# Altium PCB wakerdimmer.pcbdoc (part 1 of 2)
Units mil, origin at the board's own origin, x right, y up, seen from the top; angles counter-clockwise.
Board outline 8825.01 x 3314.36 mil, 2 copper layers (Top Layer, Bottom Layer); 48 components, 82 nets, 207 pads, 61 vias.
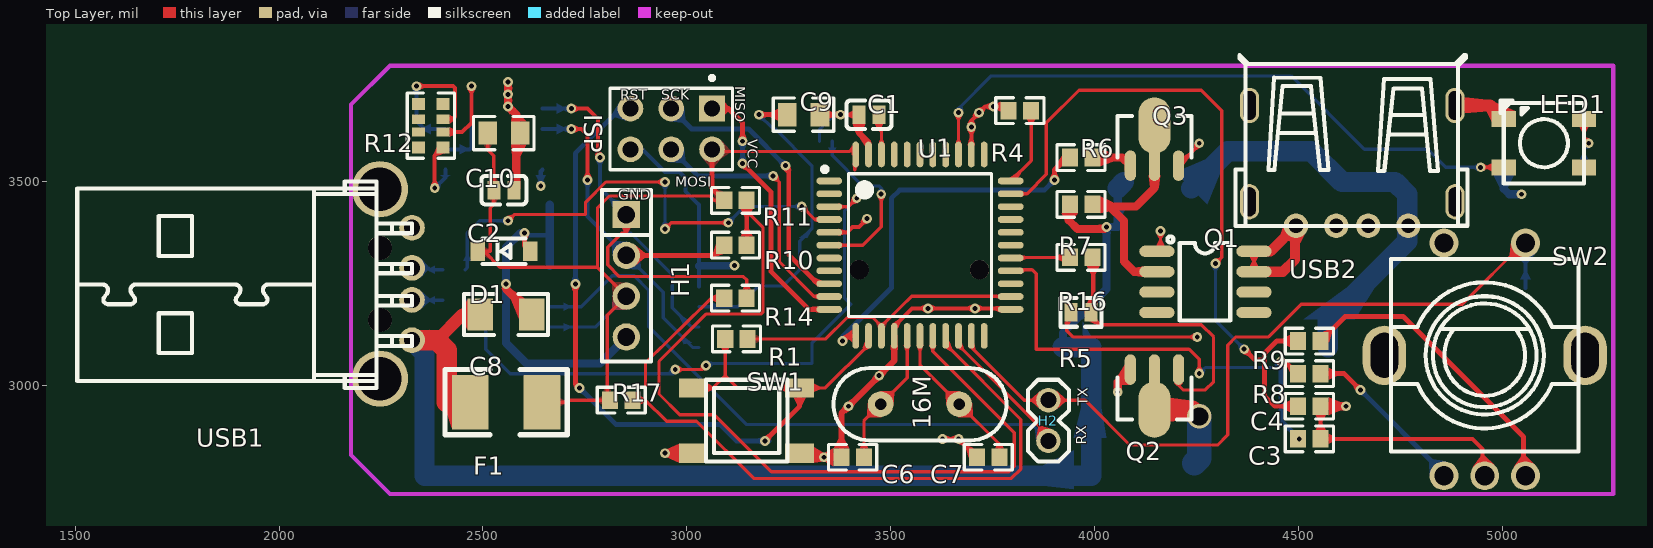
[diagram p0: Top Layer view]
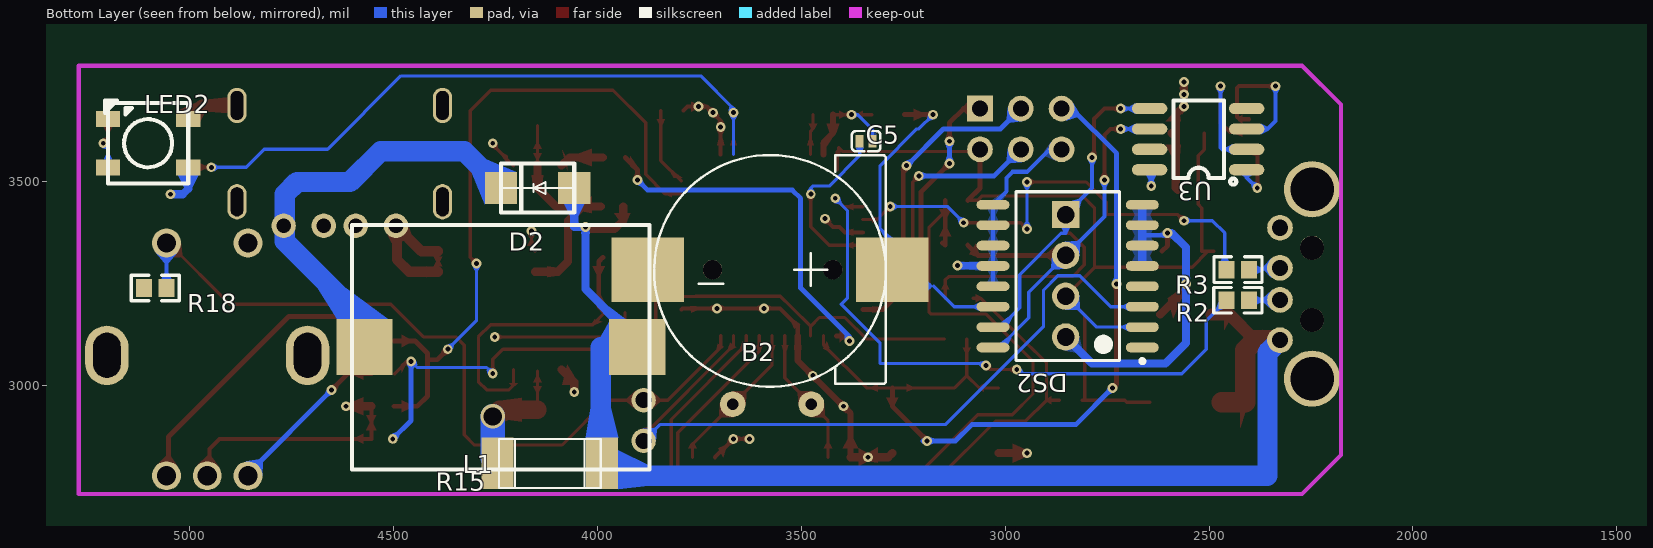
[diagram p1: Bottom Layer view, seen from below]

## Layer stack, top to bottom
Top Layer: signal copper (thickness not stored)
Dielectric: dielectric 12.6, FR-4, Dk 4.8
Bottom Layer: signal copper (thickness not stored)

## Board outline
9825.01,1000 1000,1000 1000,4314.36 9825.01,4314.36

## Components (designator, comment, footprint, x,y, rotation, side; value= is the part's Value field where it differs from the comment)
16M "16MHz" OSC-49S-1 3571.67,2953.51 r90 top
B2 "纽扣电池座CR1220-2" BATTERY-2 3276.67,3283.51 r180 bottom
C1 "100nF" CAP_0603 3446.67,3663.51 r0 top
C2 "100nF" CAP_0603 2551.28,3478.51 r180 top
C3 "100nF" 0603#1 4526.67,2868.51 r0 top
C4 "100nF" 0603#1 4526.67,2948.51 r180 top
C5 "1uF" CAP_0402 3340.92,3598.51 r0 bottom
C6 "20pF" 0603#1 3406.67,2823.51 r0 top
C7 "20pF" 0603#1 3739.11,2823.51 r0 top
C8 "10uF" 1206 2556.67,3173.51 r180 top
C9 "100nF" 0805 3286.67,3663.51 r0 top
C10 "100nF" 0805 2551.67,3618.51 r0 top
D1 "DZL4734" SOD-123F 2551.67,3328.51 r180 top
D2 "S2K" SMA 4146.67,3483.51 r180 bottom
DS2 "ds2" ? 2846.67,3208.51 r180 bottom
F1 "SMD1812P050TF/30" 1812 2556.67,2958.51 r0 top
H1 "0.91 OLED" DIP-1X4P2.54 2851.67,3268.51 r270 top
H2 "210S-1*2P L=11.6MMGold-plated black" 210S-1X2P 3886.67,2913.51 r270 top
ISP "Header-Male-2.54_2x3" HDR-TH_6PIN-V-ROW2-COL3-MALE-PITCH2.54 2961.67,3628.51 r270 top
L1 "220uH" L185152 4236.67,3093.51 r180 bottom
LED1 "LED-5050_4P" LED-5050_4P#1 5101.67,3593.51 r0 top
LED2 "LED-5050_4P" LED-5050_4P#2 5101.67,3593.51 r0 bottom
Q1 "FDS6990AS" SOIC-8_150MIL#1 4271.67,3253.51 r0 top
Q2 "2SD882T-P" SOT-89(SOT-89-3) 4141.67,2938.51 r180 top
Q3 "2SD882T-P" SOT-89(SOT-89-3) 4151.67,3638.51 r0 top
R1 "10K" 0603#1 3121.67,3113.51 r0 top
R2 "22" 0603#2 2429.23,3208.51 r0 bottom
R3 "22" 0603#2 2429.11,3283.51 r0 bottom
R4 "10K" 0603#1 3816.67,3673.51 r180 top
R5 "100K" RES_0603 3966.67,3178.51 r180 top
R6 "4.7K" 0603#1 3966.67,3558.51 r0 top
R7 "10K" 0603#1 3966.67,3443.51 r180 top
R8 "10K" 0603#1 4526.67,3028.51 r0 top
R9 "10K" 0603#1 4526.67,3108.51 r180 top
R10 "270" 0603#1 3119.23,3343.51 r180 top
R11 "5.1K" 0603#1 3119.23,3453.51 r0 top
R12 "0603_X4" 0603_X4 2371.99,3636.66 r90 top
R14 "270" 0603#1 3119.23,3213.51 r0 top
R15 "2512" 2512 4116.67,2808.51 r0 bottom
R16 "1K" 0603#1 3966.67,3313.51 r0 top
R17 "5.1K" 0603#1 2839.11,2963.51 r0 top
R18 "10K" 0603#2 5084.22,3238.51 r0 bottom
SW1 "K2-1187SQ-A4SW" KEY-5.2*5.2 3146.67,2913.51 r0 top
SW2 "EC11E1834403" EC11E1834403 4956.67,3063.51 r0 top
U1 "ATMEGA32U4-AU" QFP-44_10X10X08P 3571.67,3343.51 r0 top
U3 "SOIC-8_150MIL" SOIC-8_150MIL#2 2526.67,3603.51 r180 bottom
USB1 "USB-05" USB-M-48 2286.67,3248.51 r180 top
USB2 "A/F90degree Aparagraph 10 PBTWhite plastic6.3" USB-M-35 4631.67,3538.51 r180 top

## Footprints (in the part's own frame and the unit in brackets; to place one, negate y for a bottom-side part, rotate by r counter-clockwise, add the part's x,y. Pads: shape width x height; smd on the part's side, far side on the other; paste and mask are expansions set on the pad)
210S-1X2P [mil]
  round 60 hole 39.37: 1(-50,0) 2(50,0)
  silkscreen extent -100,-50 100,50
0603#1 [mm]
  rect 1x1.1 smd: 1(-0.7,0) 2(0.7,0)
  silkscreen extent -1.5,-0.8 1.5,0.8
0603#2 [mm]
  rect 1x1.1 smd: 1(0.7,0) 2(-0.7,0)
  silkscreen extent -1.5,-0.8 1.5,0.8
0603_X4 [mm]
  rect 0.75x0.8 smd: 1(-1.35,-0.77) 4(1.35,-0.77) 5(1.35,0.77) 8(-1.35,0.77)
  rect 0.58x0.8 smd: 2(-0.4,-0.77) 3(0.4,-0.77) 6(0.4,0.77) 7(-0.4,0.77)
  silkscreen extent -2.02,-1.47 2.02,1.47
0805 [mm]
  rect 1.16x1.45 smd: 1(-1.016,0) 2(1.016,0)
  silkscreen extent -1.9,-1.03 1.87,1.04
1206 [mil]
  rect 63x78.74 smd: 1(-62.99,0) 2(62.99,0)
  silkscreen extent -103,-50 103,50
1812 [mil]
  rect 90x133.86 smd: 1(-88,0) 2(88,0)
  silkscreen extent -150,-80 150,80
2512 [mil]
  rect 78.7x126 smd: 2(-128,0) R15_1(128,0)
  silkscreen extent -125,-60 125,60
BATTERY-2 [mm]
  round 1.2 hole 1.2: 0(-11.201,0) 0(-3.708,0)
  rect 4.5x4 smd: 1(0,0) 2(-15.24,0)
  silkscreen extent -14.84,-7.3 -0.4,7.14
CAP_0402 [mm]
  rect 0.5x0.8 smd: 1(0.4,0) 2(-0.4,0)
  silkscreen extent -0.89,-0.64 0.89,0.64
CAP_0603 [mm]
  rect 0.8x1.15 smd: 1(-0.625,0) 2(0.625,0)
  silkscreen extent -1.4,-0.89 1.4,0.89
DIP-1X4P2.54 [mm]
  rect 1.7x1.7 hole 1.1: 1(-3.81,0)
  round 1.7 hole 1.1: 2(-1.27,0) 3(1.27,0) 4(3.81,0)
  silkscreen extent -5.33,-1.52 5.33,1.52
EC11E1834403 [mm]
  round 1.8 hole 1.2: A(-2.54,-7.25) B(2.54,-7.25) C(0,-7.25) D(-2.54,7.25) E(2.54,7.25)
  oval 2.7x3.7 hole 1.7 slot 2.8 at 90 deg: F(6.25,0.25) G(-6.25,0.25)
  silkscreen extent -5.85,-5.75 5.85,6.25
HDR-TH_6PIN-V-ROW2-COL3-MALE-PITCH2.54 [mm]
  rect 1.6x1.6 hole 1: 1(-1.27,2.54)
  round 1.6 hole 1: 2(1.27,2.54) 3(-1.27,0) 4(1.27,0) 5(-1.27,-2.54) 6(1.27,-2.54)
  silkscreen extent -3.3,-3.81 2.54,3.81
KEY-5.2*5.2 [mil]
  rect 70.87x47.24 smd: 1(130,-80) 2(-130,-80) 3(130,80) 4(-130,80)
  silkscreen extent -100,-100 100,100
L185152 [mm]
  rect 3.5x3.5 smd: 1(8.5,0) 2(-8.5,0)
  silkscreen extent -9.27,-7.62 9.27,7.62
LED-5050_4P#1 [mm]
  rect 1.5x1 smd: 1(2.5,-1.5) 2(2.5,1.5) 3(-2.5,1.5) 4(-2.5,-1.5)
  silkscreen extent -2.7,-2.5 2.5,2.65
LED-5050_4P#2 [mm]
  rect 1.5x1 smd: 1(-2.5,1.5) 2(-2.5,-1.5) 3(2.5,-1.5) 4(2.5,1.5)
  silkscreen extent -2.5,-2.65 2.7,2.5
OSC-49S-1 [mm]
  round 1.6 hole 0.7: 1(0,2.45) 2(0,-2.45)
  silkscreen extent -2.25,-5.39 2.25,5.39
QFP-44_10X10X08P [mm]
  oval 1.6x0.42 smd: 1(-5.65,4) 2(-5.65,3.2) 3(-5.65,2.4) 4(-5.65,1.6) 5(-5.65,0.8) 6(-5.65,0) 7(-5.65,-0.8) 8(-5.65,-1.6) 9(-5.65,-2.4) 10(-5.65,-3.2) 11(-5.65,-4) 23(5.65,-4) 24(5.65,-3.2) 25(5.65,-2.4) 26(5.65,-1.6) 27(5.65,-0.8) 28(5.65,0) 29(5.65,0.8) 30(5.65,1.6) 31(5.65,2.4) 32(5.65,3.2) 33(5.65,4)
  oval 0.42x1.6 smd: 12(-4,-5.65) 13(-3.2,-5.65) 14(-2.4,-5.65) 15(-1.6,-5.65) 16(-0.8,-5.65) 17(0,-5.65) 18(0.8,-5.65) 19(1.6,-5.65) 20(2.4,-5.65) 21(3.2,-5.65) 22(4,-5.65) 34(4,5.65) 35(3.2,5.65) 36(2.4,5.65) 37(1.6,5.65) 38(0.8,5.65) 39(0,5.65) 40(-0.8,5.65) 41(-1.6,5.65) 42(-2.4,5.65) 43(-3.2,5.65) 44(-4,5.65)
  silkscreen extent -6.08,-4.45 4.45,4.87
RES_0603 [mm]
  rect 0.8x1.15 smd: 1(-0.625,0) 2(0.625,0)
  silkscreen extent -1.27,-0.89 1.27,0.89
SMA [mm]
  rect 2x2 smd: 1(2.286,0) 2(-2.286,0)
  silkscreen extent -2.29,-1.52 2.29,1.52
SOD-123F [mil]
  rect 35.8x48 smd: 1(-64,0) 2(64,0)
  silkscreen extent -53,-31 53,31
SOIC-8_150MIL#1 [mm]
  oval 2.2x0.7 smd: 1(-3.023,1.905) 2(-3.023,0.635) 3(-3.023,-0.635) 4(-3.023,-1.905) 5(3.023,-1.905) 6(3.023,-0.635) 7(3.023,0.635) 8(3.023,1.905)
  silkscreen extent -2.37,-2.41 1.55,2.83
SOIC-8_150MIL#2 [mm]
  oval 2.2x0.7 smd: 1(3.023,-1.905) 2(3.023,-0.635) 3(3.023,0.635) 4(3.023,1.905) 5(-3.023,1.905) 6(-3.023,0.635) 7(-3.023,-0.635) 8(-3.023,-1.905)
  silkscreen extent -1.55,-2.83 2.37,2.41
SOT-89(SOT-89-3) [mm]
  oval 0.7x1.9 smd: 1(-1.628,-2.54) 3(1.374,-2.54)
  oval 2x3.5 smd: 2(-0.127,-0.041)
  oval 0.7x2.1 smd: 2(-0.127,-2.441)
  silkscreen extent -2.43,-2.04 2.17,0.56
USB-M-35 [mil]
  oval 47.24x86.61 hole 31.5 slot 70.87 at 90 deg: 0(-252,88.55) 0(252,88.55)
  oval 47.24x86.61 hole 31.5 slot 70.86 at 90 deg: 0(-252,-147.65) 0(252,-147.65)
  round 60 hole 36: 1(137.8,147.65) 2(39.4,147.65) 3(-39.4,147.65) 4(-137.8,147.65)
  silkscreen extent -283,-271 286,148
USB-M-48 [mm]
  round 3.5 hole 2.7: 0(1,5.899) 6(1,-5.899)
  round 1.6 hole 1: 1(-1,3.501) 2(-0.998,0.999) 3(-1,-0.999) 4(-0.998,-3.499)
  round 1.5 hole 1.5 unplated: ""(1,2.25) ""(1,-2.25)
  silkscreen extent -1,-6.38 19.85,6.47
? [mil]
  oval 80.71x23.62 smd: 1(183.07,-115.9) 2(183.07,-65.9) 3(183.07,-15.9) 4(183.07,34.1) 5(183.07,84.1) 6(183.07,134.1) 7(183.07,184.1) 8(183.07,234.1) 9(-183.07,234.1) 10(-183.07,184.1) 11(-183.07,134.1) 12(-183.07,84.1) 13(-183.07,34.1) 14(-183.07,-15.9) 15(-183.07,-65.9) 16(-183.07,-115.9)
  silkscreen extent -127,-154 188,266

## Free pads (board coordinates)
  round 24 hole 12: ""(4456.67,3058.51) ""(4501.67,2868.51)

## Via types
v1: diameter 24, hole 12, Top Layer to Bottom Layer, 58 vias
v2: diameter 24.02, hole 12.21, Top Layer to Bottom Layer, 2 vias
v3: diameter 60, hole 45, Top Layer to Bottom Layer, 1 vias

## Nets (pads, with @x,y where several pads share a name; then routed paths per layer and width w, separated by ;. In a path a pad name is that pad's centre, name@x,y a point inside that pad or via, vN(x,y) a via of type N, cw(c..) or ccw(c..) an arc to the next point about the centre after c; other vN are vias at no path point)
DO: LED1.2 LED2.4 | length 127.7
  Top Layer w8: LED1.2@5200.1,3652.56 5200.1,3605.09 v1(5211.67,3593.51)
  Bottom Layer w8: LED2.4@5200.07,3534.41 5200.07,3581.91 v1(5211.67,3593.51)
DS2_1: DS2.1
DS2_4: DS2.4
DS2_14: B2.1 C9.1 DS2.14 | length 798.1
  Top Layer w12: v1(3176.67,3663.51) C9.1@3246.67,3663.51
  Bottom Layer w8: DS2.14@3029.77,3192.61 3125.07,3192.61 3175.97,3243.51 ; v1(3176.67,3663.51) 3211.67,3628.51 3216.67,3628.51 3306.67,3538.51 3306.67,3383.51 3276.67,3353.51 B2.1@3276.67,3283.51 3236.67,3243.51 3181.67,3243.51
DS2_15: DS2.15 H1.1 R14.2 U3.5 | length 1326.9
  Top Layer w8: H1.1@2851.67,3418.51 2851.67,3372.91 2840.27,3372.91 2806.07,3338.81 2806.07,3295.01 2834.57,3266.61 3138.57,3266.61 3146.67,3258.51 R14.2@3146.78,3213.51
  Top Layer w10: v1(2716.67,3678.51) 2756.67,3678.51 2781.67,3653.51 2781.67,3563.51 v1(2786.67,3558.51)
  Bottom Layer w8: H1.1@2851.67,3418.51 2851.67,3372.91 2863.07,3372.91 2964.47,3271.51 2964.47,3190.11 3011.97,3142.61 DS2.15@3029.77,3142.61
  Bottom Layer w10: U3.5@2645.67,3678.51 v1(2716.67,3678.51) ; v1(2786.67,3558.51) 2786.67,3483.51 H1.1@2851.67,3418.51
DS2_16: DS2.16 H1.2 R10.2 U3.6 | length 1010.7
  Top Layer w10: v1(2716.67,3628.51) 2741.67,3628.51 2756.67,3613.51 v1(2756.67,3503.51)
  Top Layer w12: H1.2@2851.67,3318.51 3066.67,3318.51 R10.2@3091.68,3343.51
  Bottom Layer w8: H1.2@2851.67,3318.51 2941.87,3228.31 2941.87,3165.01 3014.27,3092.61 DS2.16@3029.77,3092.61
  Bottom Layer w10: U3.6@2645.67,3628.51 v1(2716.67,3628.51) ; v1(2756.67,3503.51) 2756.67,3413.51 H1.2@2851.67,3318.51
FUSED: C2.2 C10.1 D1.2 DS2.2 F1.2 H1.3 ISP.2 LED1.1 LED2.1 R1.2 R11.1 R12.5 R12.6 R12.7 R12.8 R17.1 SW2.D U1.2 U1.7 U1.14 U1.24 U1.34 U1.44 U3.8 | length 3290.7
  Top Layer w8: D1.2@2487.67,3328.51 D1.2@2502.67,3328.51 ; C10.1@2511.67,3618.51 2511.67,3577.91 2526.67,3562.81 C2.2@2526.67,3478.51 2526.67,3443.81 2517.67,3434.71 2517.67,3328.51 D1.2@2502.67,3328.51 ; F1.2@2644.67,2958.51 2701.77,2958.51 2706.77,2963.51 R17.1@2804.57,2963.51 ; R17.1@2811.55,2963.51 R17.1@2804.57,2963.51 ; ISP.2@3061.67,3578.51 3066.67,3573.51 3399.07,3573.51 3407.87,3582.31 3407.87,3565.91 U1.44@3414.17,3565.91 ; R11.1@3091.67,3453.51 3067.37,3453.51 3057.37,3463.51 3056.77,3464.11 2810.17,3464.11 2780.67,3434.51 2780.67,3289.51 ; R1.2@3149.27,3113.51 3341.07,3113.51 3393.87,3166.21 3455.37,3166.21 U1.14@3477.17,3144.41 ; 3411.67,3528.21 U1.44@3411.67,3573.51 ; U1.14@3477.18,3121.07 U1.14@3477.17,3144.41 ; U1.24@3794.11,3217.53 3760.27,3217.51 3759.27,3218.51 3551.37,3218.51 3524.77,3191.91 U1.14@3477.17,3144.41 ; D1.2@2502.67,3328.51 2541.67,3289.51 2780.67,3289.51 ; 2780.67,3289.51 H1.3@2851.67,3218.51 2804.57,3171.41 R17.1@2804.57,2963.51
  Top Layer w12: ISP.2@3061.67,3578.51 3061.67,3483.51 R11.1@3091.67,3453.51
  Bottom Layer w8: DS2.2@2663.6,3142.61 2775.77,3142.61 H1.3@2851.67,3218.51
  Bottom Layer w10: v1(2641.67,3488.51) 2641.67,3524.51 U3.8@2645.67,3528.51
  Bottom Layer w20: LED2.1@5003.25,3534.46 5003.25,3481.93 5016.67,3468.51 v1(5046.67,3468.51)
GND: B2.2 C1.1 C2.1 C3.2 C4.1 C5.2 C6.1 C7.1 C8.1 C9.2 C10.2 D1.1 DS2.5 DS2.6 DS2.7 DS2.8 DS2.9 DS2.10 DS2.11 DS2.12 DS2.13 H1.4 ISP.6 LED1.3 LED2.3 Q1.1 Q2.3 Q3.3 R4.2 R5.2 R18.1 SW1.1 SW1.2 SW2.C U1.5 U1.15 U1.23 U1.35 U1.43 U3.4 U3.7 USB1.0 USB1.4 USB1.6 USB2.0 | length 4808.9
  Top Layer w8: C9.2@3326.67,3663.51 v1(3376.67,3663.51) C1.1@3422.06,3663.51 ; R5.2@3932.07,3178.51 3931.67,3133.51 3946.67,3118.51 v1(4251.67,3118.51) ; Q1.1@4152.67,3328.51 4161.67,3337.51 v1(4161.67,3378.51) ; Q3.3@4205.77,3538.51 4256.67,3589.41 v1(4256.67,3593.51)
  Top Layer w10: U1.5@3349.23,3375.01 3393.17,3375.01 3406.67,3388.51 3421.67,3388.51 v1(3441.67,3408.51) ; U1.15@3508.68,3121.07 3508.68,3145.52 3551.67,3188.51 v1(3591.67,3188.51) v1(3706.67,3188.51) 3791.63,3188.51 U1.23@3794.11,3186.03 ; v1@3621.67,2868.51 v1(3666.55,2868.51) C7.1@3711.55,2823.51 ; U1.35@3697.65,3565.95 v1(3697.65,3633.51) 3697.65,3649.49 v1(3716.67,3668.51) 3731.67,3683.51 v1(3751.67,3683.51) 3779.11,3683.51 R4.2@3789.12,3673.51 ; C4.1@4554.23,2948.51 C3.2@4554.23,2868.51 4926.67,2868.51 4951.67,2843.51 SW2.C@4951.67,2788.07
  Top Layer w12: v1(2601.67,3373.51) 2601.67,3342.51 D1.1@2615.67,3328.51
  Top Layer w15: C6.1@3379.11,2823.51 3379.07,2930.91 v1(3396.67,2948.51) v1(3471.67,3023.51) 3508.67,3060.51 U1.15@3508.68,3121.07 ; C1.1@3422.06,3663.51 3422.07,3618.91 3445.67,3594.51 U1.43@3445.67,3565.91
  Top Layer w20: v1(2556.67,3248.51) 2556.67,3236.5 C8.1@2619.66,3173.51 ; v1(2561.67,3743.51) v1(2561.67,3713.51) v1(2561.67,3683.51) 2581.67,3663.51 2581.67,3562.71 C2.1@2581.67,3493.51 ; C2.1@2575.89,3478.51 2581.67,3484.31 2581.67,3608.51 C10.2@2591.67,3618.51 ; v1(2946.67,2833.51) SW1.2@3016.67,2833.51 ; SW1.1@3276.67,2833.51 3286.67,2823.51 v1(3336.67,2823.51) C6.1@3379.11,2823.51 ; v1(4056.67,2983.51) 4056.67,3007.61 Q2.3@4087.57,3038.51 ; C4.1@4554.23,2948.51 v1(4616.67,2948.51)
  Top Layer w30: USB2.0@4883.67,3686.16 4969.65,3686.16 LED1.3@5003.25,3652.56
  Bottom Layer w8: C5.2@3325.17,3598.51 3325.17,3627.01 3361.67,3663.51 v1(3376.67,3663.51)
  Bottom Layer w10: ISP.6@2861.67,3578.51 2891.77,3578.51 2946.77,3523.51 2981.67,3523.51 2996.67,3508.51 2996.67,3475.69 DS2.9@3029.74,3442.61 DS2.13@3029.74,3242.61
  Bottom Layer w12: v1(2601.67,3373.51) 2607.38,3367.8 2663.6,3367.8
  Bottom Layer w20: v1(2601.67,3373.51) 2591.67,3373.51 2556.67,3338.51 v1(2556.67,3248.51) 2556.67,3103.51 2606.67,3053.51 2786.67,3053.51 H1.4@2851.67,3118.51 ; DS2.5@2663.6,3292.61 DS2.8@2663.6,3442.61 ; DS2.12@3029.77,3292.61 v1(3116.67,3293.51)
  other v1: 3626.67,2868.51
L1_2: D2.2 L1.2 USB2.4 | length 1070.7
  Bottom Layer w50: D2.2@4236.67,3483.51 4326.67,3573.51 4531.67,3573.51 4606.67,3498.51 4736.67,3498.51 4766.67,3468.51 USB2.4@4766.67,3388.06 ; L1.2@4571.32,3093.51 4571.27,3158.11 4766.67,3353.51 4766.67,3388.11 USB2.4@4769.47,3390.86
Q1_2: Q1.2 Q3.2 R7.1 | length 674.5
  Top Layer w8: R7.1@3991.67,3438.51 4053.27,3438.51 ; Q3.2@4146.67,3542.41 Q3.2@4146.67,3636.91
  Top Layer w20: Q3.2@4146.67,3542.41 4146.67,3483.51 4101.67,3438.51 3991.67,3438.51 4036.67,3438.51 4071.67,3403.51 4071.67,3303.51 4096.67,3278.51 Q1.2@4152.67,3278.51
Q1_3: Q1.3
Q1_4: Q1.4
Q1_5: Q1.5
Q1_6: Q1.6
Q1_7: Q1.7 Q1.8 USB2.1 | length 375.7
  Top Layer w8: Q1.7@4390.67,3278.51 Q1.8@4390.67,3328.51
  Top Layer w25: Q1.7@4390.67,3278.51 4461.67,3278.51 4491.67,3308.51 4491.67,3388.66 USB2.1@4493.87,3390.86 4431.52,3328.51 Q1.8@4390.67,3328.51
Q2_1: Q2.1 R5.1 R16.2 | length 728.6
  Top Layer w8: R5.1@3981.27,3178.51 4011.27,3148.51 4261.67,3148.51 4291.67,3118.51 4291.67,3008.51 4271.67,2988.51 4216.67,2988.51 4205.77,2999.41 Q2.1@4205.77,3038.51
  Top Layer w12: R5.1@3981.27,3178.51 3996.67,3193.91 3996.67,3303.51 R16.2@3986.67,3313.51
Q3_1: Q3.1 R6.2 | length 109.1
  Top Layer w20: R6.2@3986.77,3558.51 4067.57,3558.51 Q3.1@4087.57,3538.51
R15_1: Q2.2 R15.R15_1 | length 331.3
  Top Layer w8: Q2.2@4146.67,2940.11 Q2.2@4146.67,3034.61
  Top Layer w45: Q2.2@4146.67,2940.11 4240.07,2940.11 v3(4256.67,2923.51)
  Bottom Layer w60: R15.R15_1@4244.67,2808.51 4256.67,2820.51 v3(4256.67,2923.51)
S$15: 
S$17: 
S$28: 
S$38: 
S$40: 
S$61: 
S$63: 
S$67: 
S$69: 
S$71: 
S$81: 
S$83: 
S$86: 
S$88: 
S$150: 
S$152: 
S$236: 
S$240: 
S$1686: 
SW2_A: R8.2 SW2.A | length 402.3
  Top Layer w12: R8.2@4554.23,3028.51 4611.67,3028.51 v1(4651.67,2988.51)
  Bottom Layer w12: v1(4651.67,2988.51) 4851.67,2788.51 SW2.A@4851.67,2783.07
SW2_B: R9.1 SW2.B | length 734.9
  Top Layer w12: R9.1@4554.23,3108.51 4614.23,3168.51 4676.67,3168.51 4756.67,3168.51 5051.67,2873.51 SW2.B@5051.67,2783.07
SW2_F: SW2.F
SW2_G: SW2.G
U1_1: U1.1
U1_3: R2.1 U1.3 | length 1516.8
  Top Layer w8: v1(2971.67,3038.51) 3036.67,3038.51 v1(3046.67,3048.51) ; U1.3@3349.23,3438 3396.16,3438 v1(3416.67,3458.51)
  Bottom Layer w8: R2.1@2456.79,3208.51 2506.67,3158.61 2506.67,3088.51 2566.67,3028.51 2966.67,3028.51 v1(2971.67,3038.51) ; v1(3046.67,3048.51) 3051.67,3053.51 3306.67,3053.51 3306.67,3103.51 3401.67,3198.51 3386.67,3213.51 3386.67,3428.51 v1(3416.67,3458.51)
U1_4: R3.1 U1.4 | length 1215
  Top Layer w8: v1(2561.67,3403.51) 2576.67,3418.51 2751.67,3418.51 2751.67,3448.51 2801.67,3498.51 v1(2946.67,3498.51) ; v1(2946.67,3383.51) 2961.67,3398.51 v1@3106.67,3398.51 ; v1(3281.67,3438.51) 3313.68,3406.5 U1.4@3349.23,3406.5
  Bottom Layer w8: R3.1@2456.67,3283.51 2461.67,3288.51 2461.67,3373.51 2491.67,3403.51 v1@2566.67,3403.51 ; v1@2946.67,3378.51 v1(2946.67,3498.51) ; v1(3101.67,3398.51) 3141.67,3438.51 v1(3281.67,3438.51)
U1_6: C5.1 U1.6 | length 429.2
  Top Layer w8: U1.6@3349.27,3343.51 3431.67,3343.51 3476.67,3388.51 v2(3476.67,3468.51)
  Bottom Layer w8: C5.1@3356.67,3598.51 3356.67,3563.51 3431.67,3488.51 3471.67,3488.51 3476.67,3483.51 v2(3476.67,3468.51)
U1_8: U1.8
U1_9: ISP.3 U1.9 | length 688.5
  Top Layer w12: v1(3241.67,3538.51) 3249.89,3530.29 3249.89,3320.29 3321.16,3249.02 U1.9@3349.23,3249.02
  Bottom Layer w12: ISP.3@2961.67,3678.51 3011.67,3628.51 3151.67,3628.51 v1(3241.67,3538.51)
U1_10: ISP.4 U1.10 | length 651.4
  Top Layer w8: v1(3211.67,3513.51) 3226.67,3498.51 3226.67,3303.51 3312.67,3217.51 U1.10@3349.27,3217.51
  Bottom Layer w12: ISP.4@2961.67,3578.51 3026.67,3513.51 v1(3211.67,3513.51)
U1_11: ISP.1 U1.11 | length 671.5
  Top Layer w12: ISP.1@3061.67,3678.51 3101.67,3678.51 3136.67,3643.51 v1(3136.67,3598.51) ; v1@3141.67,3538.51 v1(3136.67,3543.51) 3206.67,3473.51 3206.67,3278.51 3299.17,3186.01 U1.11@3349.27,3186.01
  Bottom Layer w12: v1(3136.67,3543.51) v1(3136.67,3598.51)
U1_12: R6.1 U1.12 | length 1113.9
  Top Layer w12: v1(3381.67,3108.51) 3394.23,3121.07 U1.12@3414.19,3121.07 ; v1(3901.67,3503.51) 3901.67,3528.51 R6.1@3931.67,3558.51
  Bottom Layer w12: v1(3381.67,3108.51) 3381.67,3118.51 3501.67,3238.51 3501.67,3458.51 3521.67,3478.51 3706.67,3478.51 3716.67,3478.51 ; 3526.24,3478.51 3716.67,3478.51 ; v1(3901.67,3503.51) 3876.67,3478.51 3716.67,3478.51
U1_13: ISP.5 R1.1 SW1.3 SW1.4 U1.13 | length 2053
  Top Layer w8: SW1.4@3016.67,2993.51 3064.17,2993.51 3094.07,3023.41 ; R1.1@3094.11,3113.51 3094.07,3023.41 ; U1.13@3445.69,3121.07 3445.67,3099.71 3339.47,2993.51 SW1.3@3276.67,2993.51 3124.07,2993.51 3094.07,3023.41
  Top Layer w12: v1(2726.67,3248.51) 2726.67,3003.51 v1(2736.67,2993.51) ; v1(3191.67,2863.51) 3276.67,2948.51 SW1.3@3276.67,2993.51
  Bottom Layer w12: v1(2726.67,3248.51) 2726.67,3568.51 2836.67,3678.51 ISP.5@2861.67,3678.51 ; v1(2736.67,2993.51) 2826.67,2903.51 3081.67,2903.51 3121.67,2863.51 v1(3191.67,2863.51) v1@3201.67,2863.51
U1_16: 16M.1 C6.2 U1.16 | length 341.4
  Top Layer w8: C6.2@3434.27,2823.51 3434.27,2912.51 16M.1@3475.21,2953.51 3540.17,3018.51 U1.16@3540.17,3121.07
U1_17: 16M.2 C7.2 U1.17 | length 379.7
  Top Layer w8: U1.17@3571.67,3121.07 3571.67,3050.01 3668.17,2953.51 3764.37,2857.21 3766.67,2857.21 C7.2@3766.67,2823.51
U1_18: R10.1 R11.2 U1.18 | length 2156
  Top Layer w8: R11.2@3146.78,3453.51 3146.79,3432.23 3144.27,3429.71 3186.67,3387.31 3186.67,3178.51 3182.97,3174.81 3047.97,3174.81 2931.67,3058.51 2931.67,2978.51 2982.47,2927.71 3067.47,2927.71 3207.37,2787.81 3789.37,2787.81 3802.77,2801.21 3802.77,2883.91 3603.17,3083.51 U1.18@3603.17,3121.07
  Top Layer w12: R11.2@3146.78,3453.51 R10.1@3146.79,3343.51 3151.79,3348.51 R10.1@3154.23,3348.51
U1_19: R14.1 R17.2 U1.19 | length 1780
  Top Layer w8: R17.2@2866.67,2963.51 2898.47,2963.51 ; R14.1@3078.17,3213.51 3060.17,3213.51 2898.47,3054.61 2898.47,2963.51 ; U1.19@3634.66,3121.07 3634.67,3100.31 3818.97,2916.01 3818.97,2794.51 3796.07,2771.61 3163.57,2771.61 3023.67,2911.51 2950.47,2911.51 2898.47,2963.51
U1_20: DS2.3 H2.2 U1.20 | length 1823.5
  Top Layer w8: U1.20@3666.16,3121.07 3666.17,3098.01 3886.67,2877.51 H2.2@3886.67,2863.51
  Bottom Layer w8: DS2.3@2663.6,3192.61 2740.77,3192.61 2816.67,3268.51 2870.97,3268.51 2905.77,3233.61 2905.77,3144.41 3146.67,2903.51 3846.67,2903.51 H2.2@3886.67,2863.51
U1_21: H2.1 R18.2 SW2.E U1.21 | length 1925.9
  Top Layer w8: U1.21@3697.65,3121.07 3697.67,3092.81 3826.97,2963.51 H2.1@3886.67,2963.51 3976.67,2963.51 4086.67,2853.51 4301.67,2853.51 4326.67,2878.51 4326.67,3098.51 4346.67,3118.51 4426.67,3118.51 4506.67,3198.51 4901.27,3198.51 SW2.E@5051.67,3348.91
  Bottom Layer w10: R18.2@5056.67,3238.51 SW2.E@5056.67,3348.94
U1_22: U1.22
U1_25: U1.25
U1_26: C3.1 pad. R8.1 U1.26 | length 1174.4
  Top Layer w8: U1.26@3794.11,3280.52 3797.07,3283.51 3846.67,3283.51 3856.67,3273.51 3856.67,3088.51 4231.67,3088.51 4256.67,3063.51 v1(4256.67,3028.51) ; pad.@4456.67,3058.51 4466.67,3058.51 R8.1@4496.67,3028.51 ; C3.1@4499.11,2868.51 pad.@4501.67,2868.51
  Bottom Layer w8: v1(4256.67,3028.51) 4271.67,3043.51 4441.67,3043.51 pad.@4456.67,3058.51
  Bottom Layer w12: pad.@4456.67,3058.51 4456.67,2913.51 pad.@4501.67,2868.51
U1_27: R16.1 U1.27 | length 138.1
  Top Layer w8: U1.27@3794.11,3312.01 3795.57,3313.51 R16.1@3931.57,3313.51
U1_28: U1.28
U1_29: U1.29
U1_30: U1.30
U1_31: U1.31
U1_32: C4.2 R9.2 U1.32 | length 1692.3
  Top Layer w8: U1.32@3794.11,3469.49 3834.27,3469.51 3881.67,3516.91 3881.67,3643.51 3961.67,3723.51 4261.67,3723.51 4311.67,3673.51 4311.67,3313.51 v1(4296.67,3298.51)
  Top Layer w12: v1(4366.67,3088.51) 4392.72,3062.46 4416.67,3062.46 4416.67,3063.51 ; C4.2@4499.12,2948.51 4441.67,2948.51 4416.67,2973.51 4416.67,3078.51 4446.67,3108.51 R9.2@4499.12,3108.51
  Bottom Layer w8: v1(4296.67,3298.51) 4296.67,3158.51 v1(4366.67,3088.51)
U1_33: R4.1 U1.33 | length 193.3
  Top Layer w8: U1.33@3794.11,3500.99 3844.27,3551.11 R4.1@3844.27,3673.51
U1_36: LED1.4 U1.36 | length 1678
  Top Layer w8: U1.36@3666.16,3565.95 v1(3666.17,3668.51) ; v1(4946.67,3534.41) 4946.72,3534.46 LED1.4@5003.25,3534.46
  Bottom Layer w8: 3666.17,3565.91 v1(3666.17,3668.51) 3666.17,3678.01 3746.67,3758.51 4481.67,3758.51 4661.67,3578.51 4816.67,3578.51 4860.67,3534.41 v1(4946.67,3534.41)
U1_37: U1.37
U1_38: U1.38
U1_39: U1.39
U1_40: U1.40
U1_41: U1.41
U1_42: C1.2 U1.42 | length 100
  Top Layer w8: C1.2@3471.28,3663.51 3471.27,3628.81 3477.17,3622.91 U1.42@3477.17,3565.91
U3_1: R12.1 U3.1 | length 164.3
  Top Layer w10: v1(2381.67,3483.51) 2381.67,3562.88 R12.1@2402.3,3583.51
  Bottom Layer w10: v1(2381.67,3483.51) 2407.67,3509.51 U3.1@2407.67,3528.51
U3_2: R12.2 U3.2 | length 384.8
  Top Layer w10: R12.2@2402.3,3620.91 2449.07,3620.91 2471.67,3643.51 v1(2471.67,3733.51)
  Bottom Layer w10: U3.2@2407.67,3578.51 2466.67,3578.51 2471.67,3583.51 v1(2471.67,3733.51)
U3_3: R12.3 U3.3 | length 363.3
  Top Layer w10: v1(2336.67,3733.51) 2426.67,3733.51 2431.67,3728.51 2431.67,3658.51 2425.57,3652.41 R12.3@2402.3,3652.41
  Bottom Layer w10: v1(2336.67,3733.51) 2336.67,3648.51 2356.67,3628.51 U3.3@2407.67,3628.51
USB1_2: R2.2 USB1.2 | length 75.9
  Bottom Layer w8: USB1.2@2325.97,3209.11 2369.27,3209.11 2369.87,3208.51 R2.2@2401.68,3208.51
USB1_3: R3.2 USB1.3 | length 77.3
  Bottom Layer w8: USB1.3@2326.07,3287.81 2365.47,3287.81 2369.77,3283.51 R3.2@2401.56,3283.51
USB2_2: USB2.2
USB2_3: USB2.3
VCC: C8.2 D2.1 F1.1 L1.1 R7.2 R15.2 USB1.1 | length 3517.3
  Top Layer w20: R7.2@3936.57,3438.51 3936.57,3404.71 3957.77,3383.51 4024.17,3383.51 v2(4029.07,3388.41)
  Top Layer w30: 2387.27,3110.61 2450.07,3173.51 C8.2@2493.68,3173.51
  Top Layer w50: USB1.1@2326.07,3110.61 2387.27,3110.61 2411.57,3086.31 2411.57,2958.51 F1.1@2468.67,2958.51
  Bottom Layer w8: v2(4029.07,3388.41) 4051.67,3388.41 4056.67,3393.41 D2.1@4056.67,3483.51
  Bottom Layer w20: L1.1@3922.03,3093.51 3922.03,3128.87 4029.07,3235.91 v2(4029.07,3388.41) 4056.67,3388.41 D2.1@4056.67,3483.51
  Bottom Layer w50: USB1.1@2326.07,3110.51 2356.67,3080.01 2356.67,2778.51 3991.67,2778.51 3991.67,3093.51 L1.1@3922.07,3093.51 ; D2.1@4056.67,3483.51 D2.1@4071.67,3498.51
pads on no net: B2.0 LED2.2 R12.4 USB1.

## Polygon pours and split planes (outlines as drawn)
GND on Bottom Layer (solid): 2271.67,3783.51 2176.67,3688.51 2176.67,2828.51 2261.67,2733.51 5271.67,2733.51 5266.67,3783.51 2271.67,3783.51
FUSED on Top Layer (solid): 2271.67,3783.51 2176.67,3688.51 2176.67,2833.51 2266.67,2733.51 5271.67,2733.51 5266.67,3783.51 2271.67,3783.51

## Other copper
Top Layer:
  region net VCC: 2346.91,3134.26 2346.86,3087.01 2368.9,3085.61 2368.96,3135.61
  region net GND: 4980.67,2804.14 4927.81,2798.63 4946.67,2825.53 4956.67,2826.57
  region net SW2_B: 5080.67,2804.14 5027.81,2798.63 5045.67,2825.43 5057.67,2826.68
  region net U1_21: 5056.31,3313.51 5021.56,3353.73 5017.54,3320.44 5022.79,3314.37
  region net DS2_16: 2873.81,3293.41 2873.81,3343.61 2897.23,3324.51 2897.23,3312.51
  region net U1_17: 3636.7,2951.56 3670.12,2984.94 3640.66,2986.68 3635,2981.02
  region net U1_17: 3666.16,2922.08 3699.56,2955.49 3701.28,2926.02 3695.63,2920.36
  region net U1_16: 3473.22,2984.94 3506.65,2951.56 3508.34,2981.02 3502.68,2986.68
  region net U1_16: 3443.78,2955.47 3477.2,2922.08 3447.74,2920.35 3442.08,2926
  region net U1_21: 3906.51,2941.01 3906.51,2986.01 3927.51,2967.51 3927.51,2959.51
  region net U1_21: 3866.83,2941.01 3866.83,2986.01 3845.83,2967.51 3845.83,2959.51
  region net U1_20: 3895.75,2892.1 3857.17,2868.95 3862.12,2896.41 3869.19,2900.65
  region net Q1_7: 4463.93,3392.74 4495.75,3360.92 4473.83,3353.14 4456.15,3370.82
  region net Q1_7: 4515.27,3369.83 4470.34,3372.26 4479.17,3350.75 4504.17,3349.4
  region net U1_26: 4467.14,3064.37 4461.18,3047.39 4470.61,3048.91 4473.56,3057.28
  region net U1_6: 3467.66,3460.57 3485.68,3460.57 3480.67,3452.16 3472.67,3452.16
  region net VCC: 4024.19,3377.44 4018.8,3394.62 4010.33,3393.51 4016.61,3373.51
  region net SW2_A: 4652.42,3000.49 4639.69,2987.76 4635.88,2995.82 4644.36,3004.3
  region net DS2_14: 3184.61,3654.51 3184.61,3672.51 3193.01,3669.51 3193.01,3657.51
  region net U1_9: 3237.89,3527.12 3253.44,3536.18 3255.89,3527.88 3243.89,3520.9
  region net U1_10: 3223.65,3514.26 3210.92,3501.53 3220.39,3499.13 3226.05,3504.79
  region net U1_13: 2717.67,3240.57 2735.67,3240.57 2732.67,3232.17 2720.67,3232.17
  region net U1_13: 2737.42,3005.49 2724.69,2992.76 2722.43,2999.27 2730.91,3007.75
  region net U1_13: 3203.65,2862.76 3190.92,2875.49 3198.98,2879.3 3207.47,2870.82
  region net U1_12: 3892.67,3511.45 3910.67,3511.45 3907.67,3519.85 3895.67,3519.85
  region net U1_12: 3393.65,3107.76 3380.92,3120.49 3388.98,3124.31 3397.47,3115.82
  region net U1_11: 3148.65,3544.26 3135.92,3531.53 3143.98,3527.72 3152.47,3536.2
  region net U1_11: 3127.67,3606.45 3145.67,3606.45 3142.67,3614.85 3130.67,3614.85
  region net U1_32: 4378.65,3089.26 4365.92,3076.53 4373.98,3072.71 4382.47,3081.2
  region net U1_32: 4308.65,3297.76 4295.92,3310.49 4305.39,3312.89 4311.05,3307.23
  region net U1_26: 4247.67,3036.45 4265.67,3036.45 4260.67,3044.85 4252.67,3044.85
  region net GND: 4259.54,3581.86 4244.75,3592.12 4244.01,3582.41 4250.69,3577.77
  region net GND: 4152.67,3370.57 4170.67,3370.57 4165.67,3362.17 4157.67,3362.17
  region net R15_1: 4247.68,2952.13 4229.4,2911.02 4209.35,2917.61 4229.36,2962.61
  region net GND: 3384.61,3654.51 3384.61,3672.51 3393.01,3667.51 3393.01,3659.51
  region net GND: 3368.73,3654.51 3368.73,3672.51 3360.33,3667.51 3360.33,3659.51
  region net GND: 3442.42,3396.53 3429.69,3409.26 3426.58,3400.49 3433.65,3393.42
  region net U1_4: 2573.65,3402.76 2560.92,3415.49 2570.39,3417.89 2576.05,3412.23
  region net U1_4: 2938.73,3489.51 2938.73,3507.51 2930.33,3502.51 2930.33,3494.51
  region net U1_4: 2958.65,3382.76 2945.92,3395.49 2955.39,3397.89 2961.05,3392.23
  region net U1_4: 3093.73,3389.51 3093.73,3407.51 3085.33,3402.51 3085.33,3394.51
  region net U1_4: 3293.65,3439.26 3280.92,3426.53 3290.39,3424.13 3296.05,3429.79
  region net U1_3: 2979.61,3029.51 2979.61,3047.51 2988.01,3042.51 2988.01,3034.51
  region net U1_3: 3047.42,3036.53 3034.69,3049.26 3033.84,3041.34 3039.5,3035.68
  region net U1_3: 3417.42,3446.53 3404.69,3459.26 3402.29,3449.79 3407.95,3444.13
  region net GND: 2552.67,3735.57 2570.67,3735.57 2571.67,3727.17 2551.67,3727.17
  region net GND: 2552.67,3721.45 2570.67,3721.45 2571.67,3729.85 2551.67,3729.85
  region net GND: 2552.67,3705.57 2570.67,3705.57 2571.67,3697.17 2551.67,3697.17
  region net GND: 2573.65,3684.26 2560.92,3671.53 2566.15,3664.89 2580.29,3679.03
  region net GND: 2552.67,3691.45 2570.67,3691.45 2571.67,3699.85 2551.67,3699.85
  region net GND: 2954.61,2824.51 2954.61,2842.51 2963.01,2843.51 2963.01,2823.51
  region net GND: 3328.73,2814.51 3328.73,2832.51 3320.33,2833.51 3320.33,2813.51
  region net GND: 3344.61,2814.51 3344.61,2832.51 3353.01,2833.51 3353.01,2813.51
  region net GND: 3397.42,2936.53 3384.69,2949.26 3379.82,2942.26 3390.42,2931.65
  region net GND: 3408.65,2947.76 3395.92,2960.49 3402.92,2965.37 3413.53,2954.76
  region net GND: 3472.42,3011.53 3459.69,3024.26 3454.82,3017.26 3465.42,3006.65
  region net GND: 3483.65,3022.76 3470.92,3035.49 3477.92,3040.37 3488.53,3029.76
  region net GND: 4047.67,2991.45 4065.67,2991.45 4066.67,2999.85 4046.67,2999.85
  region net GND: 4608.73,2939.51 4608.73,2957.51 4600.33,2958.51 4600.33,2938.51
  region net GND: 2547.67,3240.57 2565.67,3240.57 2566.67,3236.5 2546.67,3236.5
  region net GND: 3599.61,3179.51 3599.61,3197.51 3608.01,3193.51 3608.01,3183.51
  region net GND: 3583.73,3179.51 3583.73,3197.51 3575.33,3193.51 3575.33,3183.51
  region net GND: 3698.73,3179.51 3698.73,3197.51 3690.33,3193.51 3690.33,3183.51
  region net GND: 3714.61,3179.51 3714.61,3197.51 3723.01,3193.51 3723.01,3183.51
  region net GND: 3688.65,3641.45 3706.65,3641.45 3702.65,3649.49 3692.65,3649.49
  region net GND: 3688.65,3625.57 3706.65,3625.57 3702.65,3617.17 3692.65,3617.17
  region net GND: 3728.65,3667.76 3715.92,3680.49 3724.69,3683.6 3731.76,3676.53
  region net GND: 3717.42,3656.53 3704.69,3669.26 3701.58,3660.49 3708.65,3653.42
  region net GND: 3759.61,3674.51 3759.61,3692.51 3768.01,3688.51 3768.01,3678.51
  region net GND: 3743.73,3674.51 3743.73,3692.51 3735.33,3688.51 3735.33,3678.51
  region net GND: 3634.61,2859.51 3634.61,2877.51 3643.01,2873.51 3643.01,2863.51
  region net GND: 3678.53,2869.26 3665.8,2856.53 3674.57,2853.42 3681.64,2860.49
  region net GND: 3658.61,2859.51 3658.61,2877.51 3650.21,2873.51 3650.21,2863.51
  region net GND: 2592.67,3365.57 2610.67,3365.57 2607.67,3357.17 2595.67,3357.17
  region net GND: 4243.73,3109.51 4243.73,3127.51 4235.33,3122.51 4235.33,3114.51
  region net U1_36: 4954.64,3525.43 4954.58,3543.43 4963,3538.46 4963.02,3530.46
  region net U1_36: 3675.17,3660.57 3657.17,3660.58 3662.16,3652.18 3670.16,3652.17
  region net DO: 5212.42,3605.49 5199.69,3592.76 5197.29,3602.23 5202.95,3607.89
  region net DS2_15: 2792.81,3568.82 2775.67,3563.31 2776.67,3572.46 2786.67,3575.67
  region net DS2_15: 2724.61,3669.51 2724.61,3687.51 2733.01,3683.51 2733.01,3673.51
  region net DS2_16: 2747.67,3511.45 2765.67,3511.45 2761.67,3519.85 2751.67,3519.85
  region net DS2_16: 2724.61,3619.51 2724.61,3637.51 2733.01,3633.51 2733.01,3623.51
  region net U3_3: 2344.61,3724.51 2344.61,3742.51 2353.01,3738.51 2353.01,3728.51
  region net U3_2: 2462.67,3725.57 2480.67,3725.57 2476.67,3717.17 2466.67,3717.17
  region net U3_1: 2372.67,3491.45 2390.67,3491.45 2386.67,3499.85 2376.67,3499.85
  region net GND: 3406.32,3653.51 3406.32,3673.51 3394.32,3667.51 3394.32,3659.51
  region net GND: 3437.81,3640.87 3406.32,3640.87 3414.57,3618.91 3429.57,3618.91
  region net U1_42: 3481.27,3640.87 3461.27,3640.87 3467.27,3628.87 3475.27,3628.87
  region net VCC: 2423.67,2896.01 2423.67,3021.01 2411.57,2983.51 2411.57,2933.51
  region net U1_13: 3052.1,3003.51 3052.1,2983.51 3064.1,2989.51 3064.1,2997.51
  region net GND: 2981.24,2809.89 2981.24,2857.13 2951.24,2843.51 2951.24,2823.51
  region net U1_13: 3312.1,3003.51 3312.1,2983.51 3324.1,2989.51 3324.1,2997.51
  region net U1_13: 3241.24,2983.51 3241.24,3003.51 3229.24,2997.51 3229.24,2989.51
  region net U1_13: 3291.67,2969.89 3261.67,2969.89 3270.67,2951.89 3282.67,2951.89
  region net GND: 3312.1,2848.51 3312.1,2809.89 3336.67,2813.51 3336.67,2833.51
  region net U1_13: 3104.07,3091.86 3084.07,3091.86 3090.07,3079.86 3098.07,3079.86
  region net GND: 2588.17,3164.79 2601.85,3212.88 2575.93,3231.38 2569.66,3209.37
  region net VCC: 2462.18,3136.01 2462.18,3211.01 2450.07,3188.51 2450.07,3158.51
  region net U1_33: 3854.27,3651.86 3834.27,3651.86 3840.27,3639.86 3848.27,3639.86
  region net GND: 3769.43,3671.01 3769.43,3695.16 3754.43,3688.51 3754.43,3678.51
  region net U1_11: 3093.17,3693.51 3093.17,3663.51 3101.67,3672.51 3101.67,3684.51
  region net DS2_14: 3223.83,3648.51 3223.83,3678.51 3205.83,3669.51 3205.83,3657.51
  region net GND: 3349.51,3673.51 3349.51,3653.51 3361.51,3659.51 3361.51,3667.51
  region net GND: 2606.67,3589.97 2568.83,3589.97 2571.67,3559.97 2591.67,3559.97
  region net GND: 2606.67,3589.97 2568.83,3589.97 2571.67,3562.71 2591.67,3562.71
  region net GND: 2568.83,3647.05 2606.67,3647.05 2591.67,3663.51 2571.67,3663.51
  region net U1_26: 4479.42,3030.32 4481.89,3050.16 4471,3059.84 4469.75,3049.77
  region net SW2_A: 4573.91,3043.51 4573.91,3013.51 4591.91,3022.51 4591.91,3034.51
  region net SW2_B: 4558.04,3130.16 4573.92,3104.71 4581.22,3127.01 4574.7,3137.46
  region net U1_32: 4479.43,3093.51 4479.43,3123.51 4461.43,3114.51 4461.43,3102.51
  region net GND: 4573.91,2881.01 4573.91,2856.01 4588.91,2863.51 4588.91,2873.51
  region net GND: 4541.73,2890.16 4566.73,2890.16 4559.23,2905.16 4549.23,2905.16
  region net GND: 4566.73,2926.86 4541.73,2926.86 4549.23,2911.86 4559.23,2911.86
  region net GND: 4573.92,2970.16 4573.92,2926.86 4603.92,2938.51 4603.92,2958.51
  region net U1_32: 4479.43,2933.51 4479.43,2963.51 4461.43,2954.51 4461.43,2942.51
  region net U1_27: 3919.42,3303.51 3919.42,3323.51 3907.42,3317.51 3907.42,3309.51
  region net Q2_1: 4011.67,3291.86 3981.67,3291.86 3990.67,3273.86 4002.67,3273.86
  region net DS2_15: 2861.67,3385.05 2841.67,3385.05 2847.67,3373.05 2855.67,3373.05
  region net U1_18: 3131.79,3365.16 3161.79,3365.16 3152.79,3383.16 3140.79,3383.16
  region net DS2_16: 3087.84,3321.86 3071.99,3347.33 3064.68,3325.01 3071.19,3314.55
  region net U1_19: 3071.98,3203.51 3071.98,3223.51 3060.17,3217.51 3060.17,3209.51
  region net DS2_15: 3136.72,3235.16 3156.72,3235.16 3150.7,3247.16 3142.7,3247.16
  region net U1_19: 2886.35,2973.51 2886.35,2953.51 2898.35,2959.51 2898.35,2967.51
  region net GND: 3360.32,2845.16 3397.82,2845.16 3386.57,2867.66 3371.57,2867.66
  region net GND: 3359.42,2801.86 3359.42,2845.16 3336.67,2833.51 3336.67,2813.51
  region net U1_16: 3424.27,2845.16 3444.27,2845.16 3438.27,2857.16 3430.27,2857.16
  region net GND: 3691.86,2823.4 3704.16,2845.16 3690.55,2851.58 3685.45,2842.54
  region net U1_17: 3756.67,2845.16 3776.67,2845.16 3770.67,2857.16 3762.67,2857.16
  region net Q2_1: 4007.02,3161.44 3987.81,3155.87 4005.59,3148.53 4014.36,3151.08
  region net Q2_1: 3981.67,3201.15 4007.02,3201.15 4002.67,3219.15 3990.67,3219.15
  region net GND: 3941.87,3155.87 3926.32,3155.87 3927.76,3143.87 3935.76,3143.87
  region net U1_12: 3919.42,3536.86 3919.42,3561.26 3901.67,3537 3905.91,3524.27
  region net Q3_1: 4013.91,3580.16 4013.91,3536.86 4043.91,3548.51 4043.91,3568.51
  region net Q1_2: 4013.92,3463.51 4013.92,3421.86 4043.92,3428.51 4043.92,3448.51
  region net Q1_2: 4013.92,3448.51 4013.92,3428.51 4025.92,3434.51 4025.92,3442.51
  region net Q1_2: 4013.92,3463.51 4013.92,3421.86 4036.67,3428.51 4036.67,3448.51
  region net VCC: 3958.8,3421.86 3919.43,3421.86 3926.57,3404.71 3946.57,3404.71
  region net U1_18: 3156.42,3431.86 3136.42,3431.86 3147.1,3426.88 3141.44,3432.54
  region net U1_18: 3161.79,3431.86 3131.79,3431.86 3140.79,3413.86 3152.79,3413.86
  region net DO: 5210.09,3632.91 5190.09,3632.91 5196.09,3620.91 5204.09,3620.91
  region net GND: 4973.7,3646.58 5032.79,3672.21 4984.44,3692.58 4959.04,3675.55
  region net U1_36: 4973.7,3524.46 4973.7,3544.46 4961.7,3538.46 4961.7,3530.46
  region net U3_3: 2418.05,3663.83 2418.05,3640.99 2425.57,3647.41 2425.57,3657.41
  region net U3_2: 2418.05,3632.33 2418.05,3609.49 2433.05,3615.91 2433.05,3625.91
  region net U3_1: 2406.5,3568.75 2386.55,3583.82 2380.96,3569.24 2389.02,3563.16
  region net U1_3: 3372.46,3429.73 3372.46,3446.27 3384.46,3442 3384.46,3434
  region net U1_4: 3326,3398.23 3326,3414.77 3314,3410.5 3314,3402.5
  region net GND: 3372.46,3366.74 3372.46,3383.28 3387.46,3380.01 3387.46,3370.01
  region net U1_6: 3372.46,3335.24 3372.46,3351.78 3384.46,3347.51 3384.46,3339.51
  region net U1_9: 3330.63,3255.87 3321.37,3242.17 3307.67,3254.03 3314.51,3264.16
  region net U1_10: 3326.02,3209.26 3325.99,3225.8 3313.99,3221.51 3314.01,3213.51
  region net U1_11: 3326.01,3177.76 3325.99,3194.3 3308,3192.01 3308.01,3180.01
  region net U1_12: 3405.92,3106.07 3405.92,3136.07 3394.23,3127.07 3394.23,3115.07
  region net U1_13: 3446.42,3089.61 3437.42,3107.47 3431.92,3091.62 3435.69,3084.07
  region net GND: 3516.95,3097.84 3500.42,3097.84 3501.17,3075.34 3516.17,3075.34
  region net GND: 3502.05,3149.23 3516.95,3138.15 3523.01,3152.77 3515.45,3159.36
  region net U1_16: 3548.44,3097.84 3531.9,3097.84 3536.17,3085.84 3544.17,3085.84
  region net U1_17: 3579.94,3097.84 3563.4,3097.84 3567.67,3085.84 3575.67,3085.84
  region net U1_18: 3611.44,3097.84 3594.9,3097.84 3599.17,3085.84 3607.17,3085.84
  region net U1_19: 3642.93,3108.2 3635.53,3089.62 3646.06,3083.26 3649.24,3091.39
  region net U1_20: 3674.43,3104.15 3659.59,3092.82 3673.21,3085.32 3678.69,3091.15
  region net U1_21: 3704.96,3101.7 3690.34,3093.98 3699.55,3085.27 3706.96,3089.18
  region net GND: 3772.25,3194.18 3769.52,3177.88 3755.25,3183.51 3756.93,3193.51
  region net U1_26: 3819.4,3272.51 3815.28,3288.53 3827.93,3287.51 3829.99,3279.51
  region net U1_27: 3818.37,3303.81 3816.31,3320.21 3828.74,3317.51 3829.75,3309.51
  region net U1_32: 3817.36,3461.22 3817.32,3477.76 3829.33,3473.51 3829.35,3465.51
  region net U1_33: 3792.34,3509.26 3812.34,3509.26 3820.02,3521.26 3808.7,3521.26
  region net GND: 3705.92,3589.18 3689.38,3589.18 3692.65,3604.18 3702.65,3604.18
  region net U1_36: 3674.43,3589.18 3657.9,3589.18 3662.16,3601.18 3670.16,3601.18
  region net U1_42: 3485.45,3589.19 3468.91,3589.17 3473.17,3601.18 3481.17,3601.18
  region net GND: 3437.42,3585.76 3453.33,3592.34 3437.72,3613.52 3425.32,3604.76
  region net GND: 4151.67,3342.29 4171.67,3342.29 4165.67,3354.29 4157.67,3354.29
  region net Q1_2: 4123.15,3264.73 4123.15,3292.29 4096.67,3288.51 4096.67,3268.51
  region net Q1_7: 4400.67,3314.73 4380.67,3314.73 4386.67,3302.73 4394.67,3302.73
  region net Q1_7: 4420.2,3264.73 4420.2,3292.29 4457.7,3291.01 4457.7,3266.01
  region net Q1_7: 4380.67,3292.29 4400.67,3292.29 4394.67,3304.29 4386.67,3304.29
  region net Q1_2: 4156.67,3569.3 4136.67,3569.3 4142.67,3557.3 4150.67,3557.3
  region net Q1_2: 4160.45,3514.85 4132.89,3514.85 4136.67,3484.85 4156.67,3484.85
  region net Q1_2: 4156.67,3579.45 4136.67,3579.45 4142.67,3591.45 4150.67,3591.45
  region net GND: 4219.55,3562.29 4219.55,3542.29 4231.55,3558.63 4231.55,3569.95
  region net Q3_1: 4073.79,3527.29 4085.87,3575.81 4067.57,3544.37 4074.64,3565.58
  region net R15_1: 4156.67,3007.72 4136.67,3007.72 4142.67,3019.72 4150.67,3019.72
  region net R15_1: 4186.04,2969.64 4186.04,2910.58 4240.07,2917.61 4240.07,2962.61
  region net R15_1: 4156.67,2997.57 4136.67,2997.57 4142.67,2985.57 4150.67,2985.57
  region net GND: 4085.88,3001.21 4073.79,3049.73 4056.67,3021.75 4063.74,3000.54
  region net Q2_1: 4215.77,3005.41 4195.77,3005.41 4201.77,2999.41 4209.77,2999.41
  region net GND: 4907.29,3705.85 4907.29,3666.47 4952.29,3671.16 4952.29,3701.16